# Altium PCB PCB_СDC_emu_ALPINE.PcbDoc
Units mm, origin at the board's own origin, x right, y up, seen from the top; angles counter-clockwise.
Board outline 73 x 43 mm, 2 copper layers (Top Layer, Bottom Layer); 51 components, 60 nets, 225 pads, 15 vias.
Unrouted connection lines stored in the file: 1.
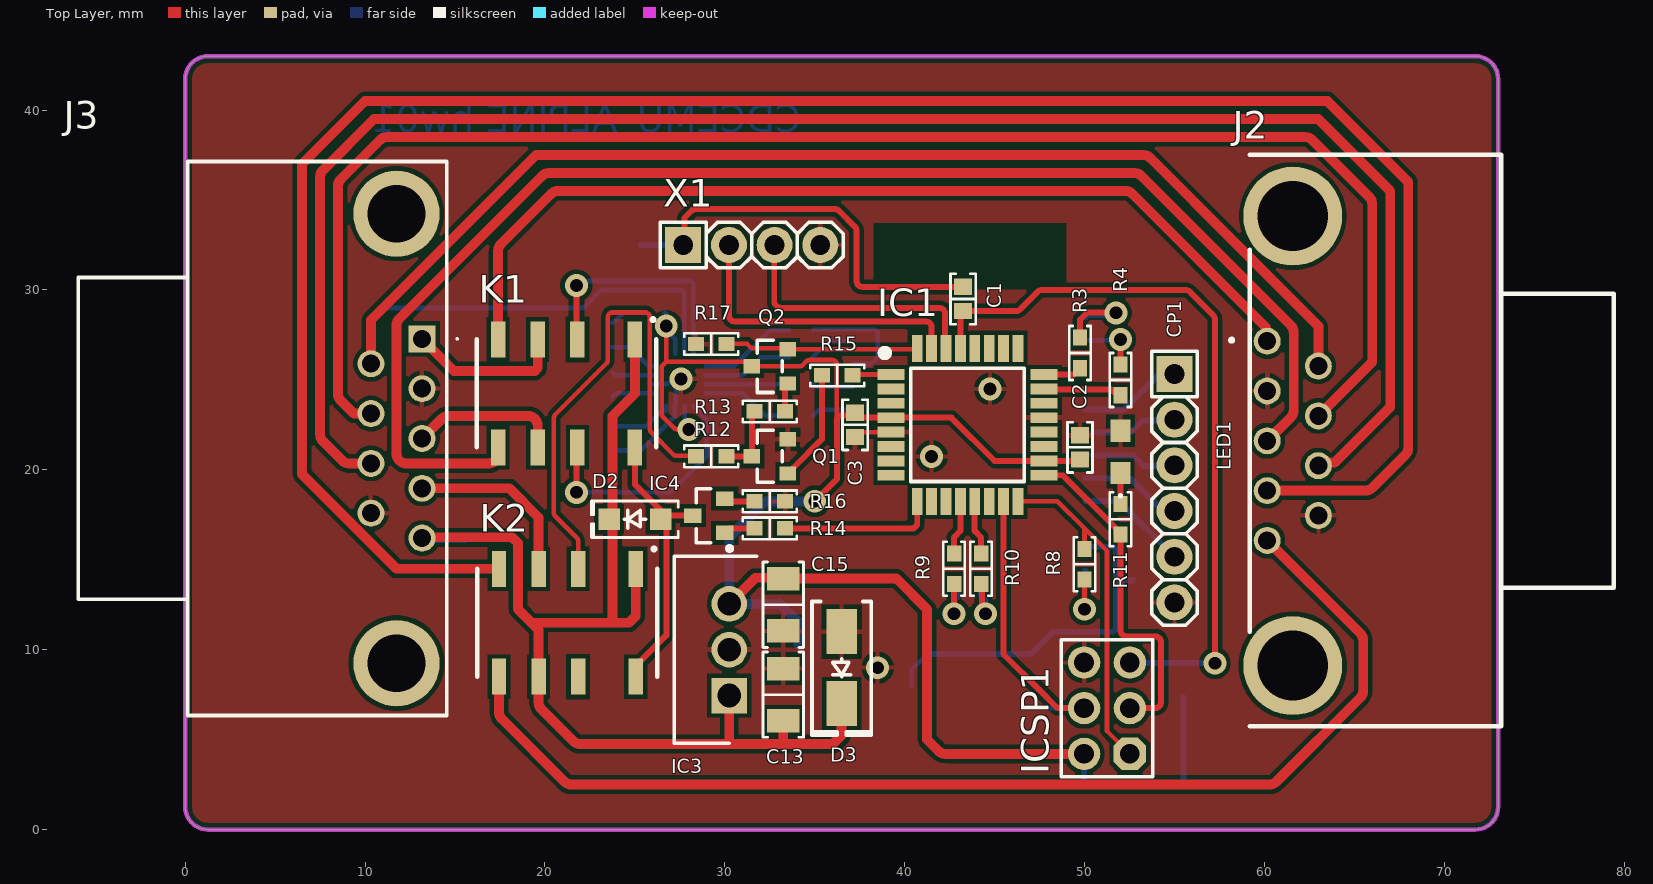
[diagram p0: Top Layer view]
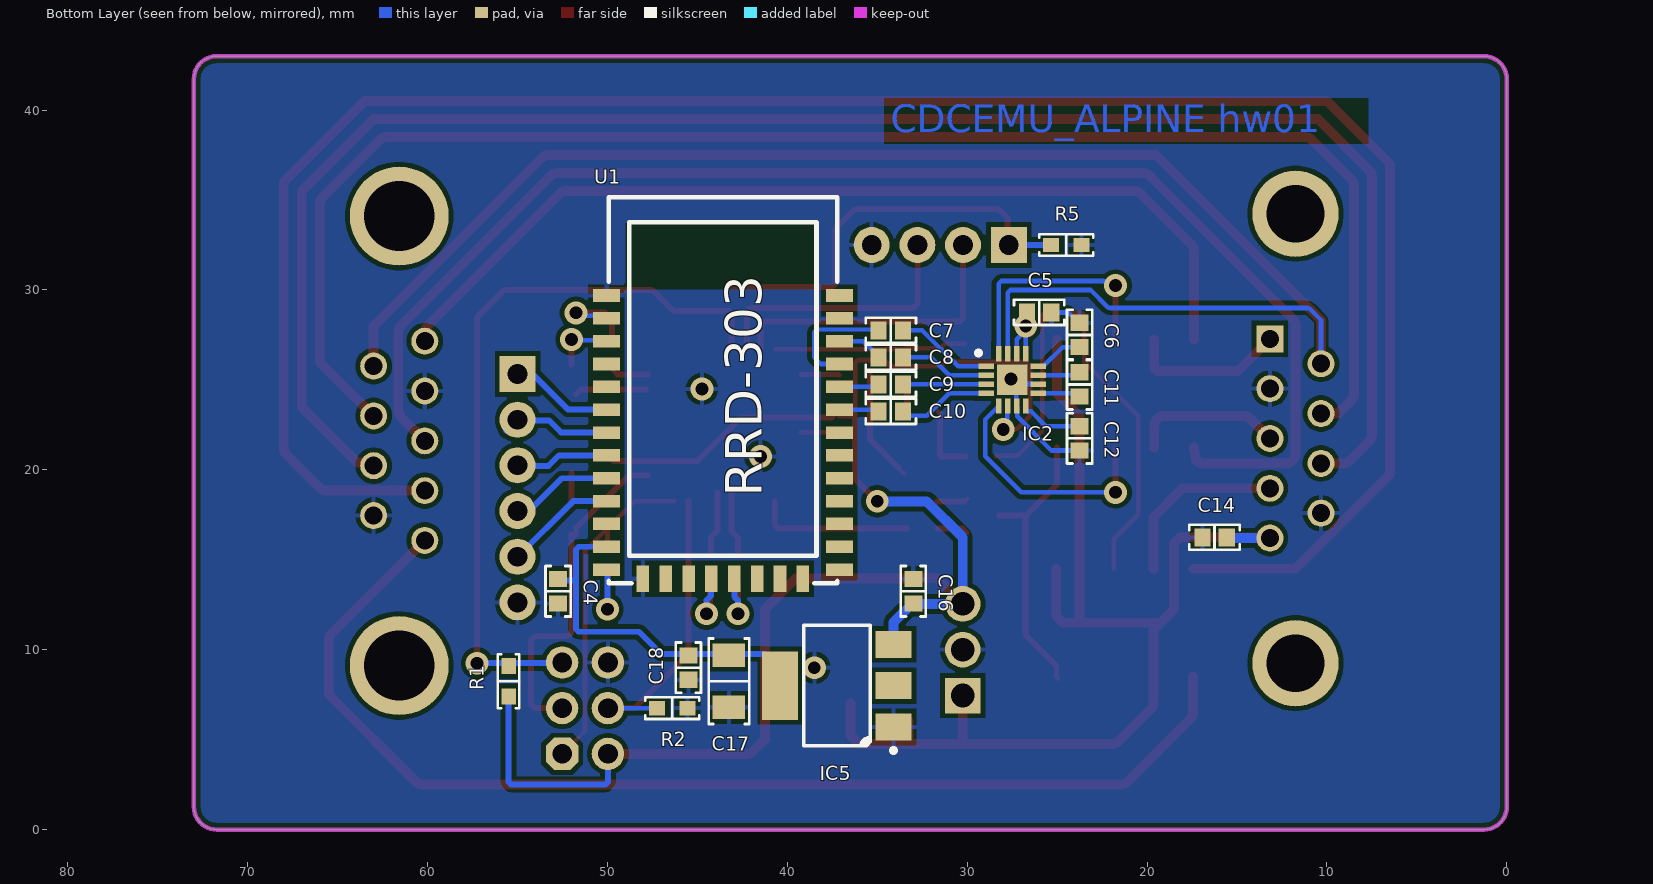
[diagram p1: Bottom Layer view, seen from below]
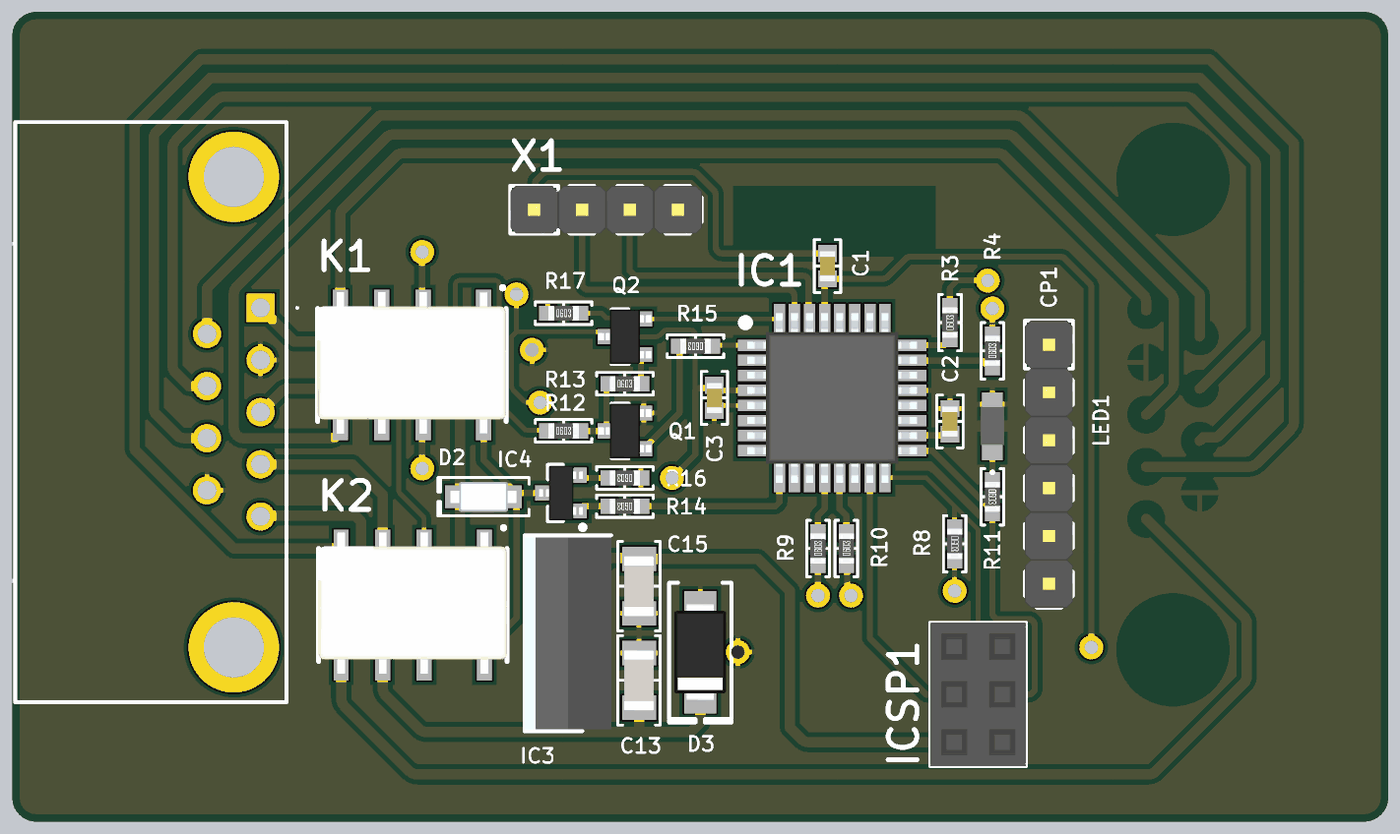
[diagram p2: 3D render of the assembled board from above, using the file's embedded part models]
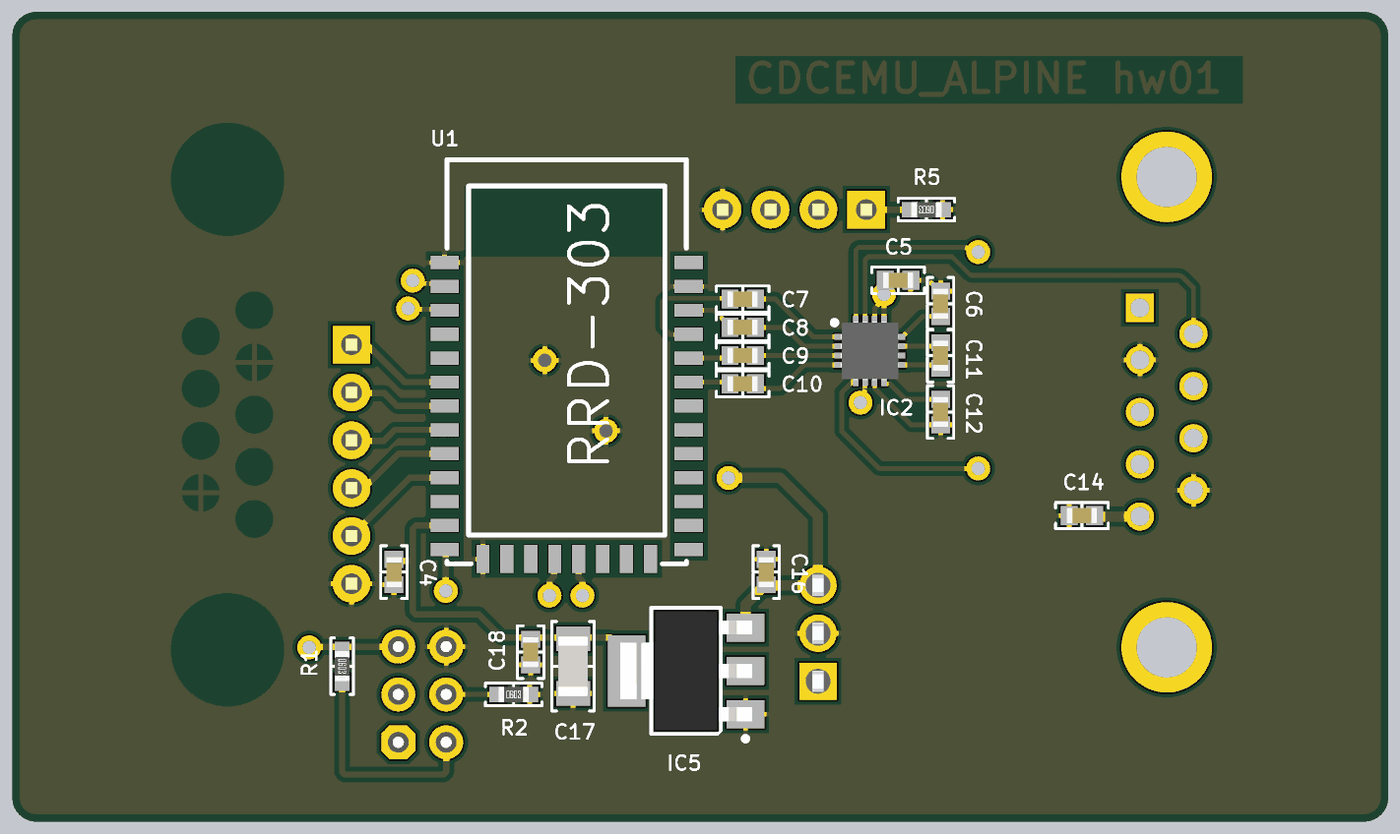
[diagram p3: 3D render of the assembled board from below, using the file's embedded part models]

## Layer stack, top to bottom
Top Solder: solder mask 0.0102, Solder Resist, Dk 3.5
Top Layer: signal copper 0.0356
Dielectric 1: dielectric 0.32, FR-4, Dk 4.8
Bottom Layer: signal copper 0.0356
Bottom Solder: solder mask 0.0102, Solder Resist, Dk 3.5

## Board outline
1.27,0 cw(c1.27,1.27) 0,1.27 0,41.73 cw(c1.27,41.73) 1.27,43 71.73,43 cw(c71.73,41.73) 73,41.73 73,1.27 cw(c71.73,1.27) 71.73,0

## Design rules (kind name [scope] priority, off if disabled: settings)
Clearance [All] p1: gap=0.254 ignorepadtopadclearanceinfootprint=FALSE except(0.127: Arc-Text Arc-Hole Track-Text Track-Hole SMDPad-Text SMDPad-Hole THPad-Text THPad-Hole Via-Text Via-Hole Fill-Text Fill-Hole Poly-Text Poly-Hole Region-Text Region-Hole Text-Text Text-Hole; 0.15: Arc-Arc Arc-Track Arc-SMDPad Arc-THPad Arc-Via Track-Track Track-SMDPad Track-THPad Track-Via SMDPad-SMDPad SMDPad-THPad SMDPad-Via THPad-THPad THPad-Via Via-Via)
PolygonConnect [All] p1: connectstyle=Relief reliefconductorwidth=0.254 reliefentries=4 polygonreliefangle="90 Angle" airgapwidth=0.254
RoutingVias [All] p1: holewidth=0.711 width=1.27 viastyle="Through Hole" minholewidth=0.711 minwidth=1.27 maxholewidth=0.711 maxwidth=1.27
SolderMaskExpansion [All] p1: expansion=0.102 istentingtop=FALSE
Width [All] p1: maxlimit=0.55 minlimit=0.22 preferedwidth=0.33 minimp=50.000000 maximp=50.000000 favimp=50.000000
30 further rules are at their usual default settings.

## Classes and differential pairs
component class DIFFAMP: C5 C6 C7 C8 C9 C10 C11 C12 C13 C14 C15 C16 C17 C18 D2 D3 IC2 IC3 IC4 IC5 J2 J3 K1 K2 Q1 Q2 R12 R13 R14 R15 R16 R17
component class MC: C1 C2 C3 C4 CP1 IC1 ICSP1 LED1 R1 R2 R3 R4 R5 R8 R9 R10 R11 U1 X1

## Components (designator, comment, footprint, x,y, rotation, side; value= is the part's Value field where it differs from the comment)
C1 "0.1 µF" "CAP 0603_1608" 43.25,29.5 r270 top
C2 "0.1 µF" "CAP 0603_1608" 49.75,21.25 r270 top
C3 "0.1 µF" "CAP 0603_1608" 37.25,22.5 r90 top
C4 "0.1 µF" "CAP 0603_1608" 52.75,13.25 r90 bottom
C5 "1 µF" "CAP 0603_1608" 26,28.75 r0 bottom
C6 "1 µF" "CAP 0603_1608" 23.75,27.5 r90 bottom
C7 "1 µF" "CAP 0603_1608" 34.25,27.75 r180 bottom
C8 "1 µF" "CAP 0603_1608" 34.25,26.25 r180 bottom
C9 "1 µF" "CAP 0603_1608" 34.25,24.75 r180 bottom
C10 "1 µF" "CAP 0603_1608" 34.25,23.25 r180 bottom
C11 "1 µF" "CAP 0603_1608" 23.75,24.75 r90 bottom
C12 "1 µF" "CAP 0603_1608" 23.75,21.75 r90 bottom
C13 "22 µF" "CAP 1206_3216 - 0.8MM" 33.25,7.5 r270 top
C14 "0.1 µF" "CAP 0603_1608" 16.25,16.25 r180 bottom
C15 "22 µF" "CAP 1206_3216 - 0.8MM" 33.25,12.5 r90 top
C16 "0.1 µF" "CAP 0603_1608" 33,13.25 r270 bottom
C17 "22 µF" "CAP 1206_3216 - 0.8MM" 43.25,8.25 r90 bottom
C18 "0.1 µF" "CAP 0603_1608" 45.5,9 r90 bottom
CP1 "Connector, 6pin, 2.54mm, 500VAC, 3A" "CON: PLS-6" 55,18.98 r270 top
D2 "SM4001PL-TP" SOD123F 25,17.25 r180 top
D3 "SMAJ12A-TR" "DO214AC SMA" 36.5,9 r270 top
IC1 "ATMEGA328PB-AU" QFP80P900X900X120-32N 43.5,22.5 r0 top
IC2 "PAM8908JER" QFN50P300X300X65-17N 27.5,25 r180 bottom
IC3 "L7805CV" TO255P460X1020X2008-3P 30.25,7.45 r90 top
IC4 "IRLML6244TRPBF" "INFINEON SOT-23-3" 29.115,17.45 r180 top
IC5 "LDL1117S33R" "ST SOT-223" 37.25,8 r0 bottom
ICSP1 "Connector, 6pin, 2.54mm, 500VAC, 3A" "CON: PBD-6" 51.25,6.75 r90 top
J2 "DS1037-01-09FNAKSI74" DS1037-01-09FNAKSI74 79.43,21.615 r90 top
J3 "DS1037-01-09MNAKT74" DS10370109MNAKT74 13.17,27.285 r270 top
K1 "IM03GR" IM06GR 21.2,24.25 r180 top
K2 "IM03GR" IM06GR 21.25,11.5 r180 top
LED1 "KP2012SGC" KP2012SGC 52,21 r90 top
Q1 "BC817-25-7-F" "DIODES SOT-23-3" 32.5,20.75 r180 top
Q2 "BC817-25-7-F" "DIODES SOT-23-3" 32.5,25.75 r180 top
R1 "10 kOhms" "YAGEO RES 0603_1608" 55.5,8.25 r270 bottom
R2 "10 kOhms" "YAGEO RES 0603_1608" 46.4,6.75 r180 bottom
R3 "10 kOhms" "YAGEO RES 0603_1608" 49.75,26.5 r90 top
R4 "10 kOhms" "YAGEO RES 0603_1608" 52,25 r90 top
R5 "10 kOhms" "YAGEO RES 0603_1608" 24.5,32.5 r0 bottom
R8 "10 kOhms" "YAGEO RES 0603_1608" 50,14.75 r270 top
R9 "10 kOhms" "YAGEO RES 0603_1608" 42.75,14.5 r90 top
R10 "10 kOhms" "YAGEO RES 0603_1608" 44.25,14.5 r90 top
R11 "1 kOhms" "YAGEO RES 0603_1608" 52,17.25 r270 top
R12 "22 Ohms" "YAGEO RES 0603_1608" 29.25,20.75 r0 top
R13 "150 kOhms" "YAGEO RES 0603_1608" 32.5,23.25 r0 top
R14 "10 kOhms" "YAGEO RES 0603_1608" 32.5,16.75 r180 top
R15 "4.7 kOhms" "YAGEO RES 0603_1608" 36.25,25.25 r180 top
R16 "10 Ohms" "YAGEO RES 0603_1608" 32.5,18.25 r180 top
R17 "10 kOhms" "YAGEO RES 0603_1608" 29.25,27 r0 top
U1 "RRD-303" RRD-303 43.586,24.239 r180 bottom
X1 "Connector, 4pin, 2.54mm, 500VAC, 3A" "CON: PLS-4" 31.501,32.499 r0 top

## Footprints (in the part's own frame and the unit in brackets; to place one, negate y for a bottom-side part, rotate by r counter-clockwise, add the part's x,y. Pads: shape width x height; smd on the part's side, far side on the other; paste and mask are expansions set on the pad)
"CAP 0603_1608" [mm] "Chip Capacitor, 2-Leads, Body 1.60x0.80mm, IPC Medium Density"
  rect 0.9x1 smd: 1(-0.675,0) 2(0.675,0)
  silkscreen extent -1.4,-0.7 1.4,0.7, body extent -0.8,-0.41 0.8,0.41, height 0.82
"CAP 1206_3216 - 0.8MM" [mm] "Chip Capacitor, 2-Leads, Body 3.25x1.60mm, IPC Medium Density"
  rect 1.3x1.8 smd: 1(-1.45,0) 2(1.45,0)
  silkscreen extent -2.38,-1.13 2.37,1.12, body extent -1.6,-0.8 1.6,0.8, height 0.8
"CON: PBD-6" [mm] "PBD-6"
  oct 1.8x1.8 hole 1.1: 1(-2.54,-1.27)
  round 1.8 hole 1.1: 2(-2.54,1.27) 3(0,-1.27) 4(0,1.27) 5(2.54,-1.27) 6(2.54,1.27)
  silkscreen extent -3.81,-2.54 3.81,2.54, body extent -3.81,-2.54 3.81,2.54, height 8.5
"CON: PLS-4" [mm] "PLS-40 4 pin header"
  rect 2x2 hole 1.1: 1(-3.81,0)
  round 2 hole 1.1: 2(-1.27,0) 3(1.27,0) 4(3.81,0)
  silkscreen extent -5.08,-1.27 5.08,1.27, body extent -5.08,-1.27 5.08,1.27, height 8.54
"CON: PLS-6" [mm]
  rect 2x2 hole 1.1: 1(-6.35,0)
  round 2 hole 1.1: 2(-3.81,0) 3(-1.27,0) 4(1.27,0) 5(3.81,0) 6(6.35,0)
  silkscreen extent -7.62,-1.27 7.62,1.27, body extent -7.62,-1.27 7.62,1.27, height 8.54
"DIODES SOT-23-3" [mm] "SOT23, 3-Leads, Body 2.90x2.40mm, Pitch 0.95mm, IPC Medium Density"
  rect 0.9x0.8 smd: 1(-1,0.95) 2(-1,-0.95) 3(1,0)
  silkscreen extent -0.7,-1.45 0.7,1.45, body extent -1.41,-1.45 1.41,1.45, height 1.5
"DO214AC SMA" [mm] "Molded Diode, 2-Leads, Body 4.30x2.60mm, IPC Medium Density"
  rect 2.5x1.7 smd: 1(-2,0) 2(2,0)
  silkscreen extent -3.68,-1.65 3.75,1.65, body extent -2.6,-1.37 2.6,1.37, height 2.4
DS1037-01-09FNAKSI74 [mm]
  round 1.5 hole 1: 1(5.54,19.27) 2(2.77,19.27) 3(0,19.27) 4(-2.77,19.27) 5(-5.54,19.27) 6(4.155,16.43) 7(1.385,16.43) 8(-1.385,16.43) 9(-4.155,16.43)
  round 5.5 hole 3.9: 10(-12.495,17.85) 11(12.495,17.85)
  silkscreen extent -15.86,0 15.91,21.32
DS10370109MNAKT74 [mm]
  rect 1.5x1.5 hole 1: 1(0,0)
  round 1.5 hole 1: 2(2.77,0) 3(5.54,0) 4(8.31,0) 5(11.08,0) 6(1.385,-2.84) 7(4.155,-2.84) 8(6.925,-2.84) 9(9.695,-2.84)
  round 4.8 hole 3.2: MH1(-6.955,-1.42) MH2(18.035,-1.42)
  silkscreen extent -9.86,-19.12 20.94,2
IM06GR [mm]
  rect 0.8x2 smd: 1(-3.8,-3) 2(-0.6,-3) 3(1.6,-3) 4(3.8,-3) 5(3.8,3) 6(1.6,3) 7(-0.6,3) 8(-3.8,3)
  silkscreen extent -5,-4.17 5,3, body extent -5,-3.86 5,3.64, height 5.65
"INFINEON SOT-23-3" [mm] "SOT23, 3-Leads, Body 2.90x2.40mm, Pitch 0.95mm, IPC Medium Density"
  rect 0.972x0.802 smd: 1(-0.885,0.95) 2(-0.885,-0.95) 3(0.885,0)
  silkscreen extent -1.28,-1.5 0.7,1.95, body extent -1.16,-1.45 1.16,1.45, height 1
KP2012SGC [mm]
  rect 1.25x1.1 smd: 1(-1.175,0) 2(1.175,0)
  silkscreen extent -2.5,-0.05 -2.4,0.05, body extent -1,-0.63 1,0.63, height 1.2
QFN50P300X300X65-17N [mm]
  rect 0.85x0.3 smd: 1(-1.45,0.75) 2(-1.45,0.25) 3(-1.45,-0.25) 4(-1.45,-0.75) 9(1.45,-0.75) 10(1.45,-0.25) 11(1.45,0.25) 12(1.45,0.75)
  rect 0.3x0.85 smd: 5(-0.75,-1.45) 6(-0.25,-1.45) 7(0.25,-1.45) 8(0.75,-1.45) 13(0.75,1.45) 14(0.25,1.45) 15(-0.25,1.45) 16(-0.75,1.45)
  rect 1.7x1.7 smd: 17(0,0)
  silkscreen extent -2,1.38 -1.75,1.62, body extent -1.55,-1.55 1.55,1.55, height 0.65
QFP80P900X900X120-32N [mm]
  rect 1.5x0.6 smd: 1(-4.25,2.8) 2(-4.25,2) 3(-4.25,1.2) 4(-4.25,0.4) 5(-4.25,-0.4) 6(-4.25,-1.2) 7(-4.25,-2) 8(-4.25,-2.8) 17(4.25,-2.8) 18(4.25,-2) 19(4.25,-1.2) 20(4.25,-0.4) 21(4.25,0.4) 22(4.25,1.2) 23(4.25,2) 24(4.25,2.8)
  rect 0.6x1.5 smd: 9(-2.8,-4.25) 10(-2,-4.25) 11(-1.2,-4.25) 12(-0.4,-4.25) 13(0.4,-4.25) 14(1.2,-4.25) 15(2,-4.25) 16(2.8,-4.25) 25(2.8,4.25) 26(2,4.25) 27(1.2,4.25) 28(0.4,4.25) 29(-0.4,4.25) 30(-1.2,4.25) 31(-2,4.25) 32(-2.8,4.25)
  silkscreen extent -4.8,-3.15 3.15,4.2, body extent -4.5,-4.5 4.5,4.5, height 1.2
RRD-303 [mm]
  rect 1.5x0.7 smd paste+0 mask+0.051: 1(-6.477,5.455) 2(-6.477,4.185) 3(-6.477,2.915) 4(-6.477,1.645) 5(-6.477,0.375) 6(-6.477,-0.895) 7(-6.477,-2.165) 8(-6.477,-3.435) 9(-6.477,-4.705) 10(-6.477,-5.975) 11(-6.477,-7.245) 12(-6.477,-8.515) 13(-6.477,-9.785) 14(6.477,5.455) 15(6.477,4.185) 16(6.477,2.915) 17(6.477,1.645) 18(6.477,0.375) 19(6.477,-0.895) 20(6.477,-2.165) 21(6.477,-3.435) 22(6.477,-4.705) 23(6.477,-5.975) 24(6.477,-7.245) 25(6.477,-8.515) 26(6.477,-9.785)
  rect 0.7x1.5 smd paste+0 mask+0.051: 27(-4.445,-10.293) 28(-3.175,-10.293) 29(-1.905,-10.293) 30(-0.635,-10.293) 31(0.635,-10.293) 32(1.905,-10.293) 33(3.175,-10.293) 34(4.445,-10.293)
  silkscreen extent -6.35,-10.55 6.35,10.92
SOD123F [mm] "SODFL, 2-Leads, Body 1.60x3.50mm, IPC Medium Density"
  rect 1.2x1.2 smd: 1(-1.43,0) 2(1.43,0)
  silkscreen extent -2.41,-1.02 2.41,1.02, body extent -1.75,-0.8 1.75,0.8, height 1.1
"ST SOT-223" [mm] "SOT223, 4-Leads, Body 6.50x7.00mm (avg), Pitch 2.30mm, IPC Medium Density"
  rect 2x1.5 smd: 1(-3.15,2.3) 2(-3.15,0) 3(-3.15,-2.3)
  rect 2x3.8 smd: 4(3.15,0)
  silkscreen extent -3.27,-3.35 1.85,3.72, body extent -3.52,-3.25 3.5,3.25, height 1.8
TO255P460X1020X2008-3P [mm]
  rect 1.98x1.98 hole 1.32: 1(0,0)
  round 1.98 hole 1.32: 2(2.55,0) 3(5.1,0)
  silkscreen extent -2.65,-1.53 7.75,3.07, body extent -2.55,-1.53 7.65,3.07, height 19.21
"YAGEO RES 0603_1608" [mm] "Chip Resistor, 2-Leads, Body 1.60x0.80mm"
  rect 0.9x0.8 smd: 1(-0.85,0) 2(0.85,0)
  silkscreen extent -1.5,-0.6 1.5,0.6, body extent -0.8,-0.4 0.8,0.4, height 0.45

## Part data
C1 C2 C3 C4 C14 C16 C18: library part CC0603KRX7R7BB104, "CAP CER 0.1UF 16V X7R 0603", Device Package="0603 (1608 Metric)", Manufacturer=Yageo, Operating Temperature="-55°C ~ 125°C", Supplier Part Number 1=311-1088-1-ND, Temperature Coefficient=X7R, Tolerance=±10%, Voltage - Rated=16V, Applications="General Purpose", Capacitance="0.1 µF", componentlink1description=Datasheet, componentlink1url=https://www.yageo.com/upload/media/product/productsearch/datasheet/mlcc/UPY-GPHC_X7R_6.3V-to-50V_18.pdf, componentlink2description="DigiKey Link", componentlink2url=https://www.digikey.com/en/products/detail/yageo/CC0603KRX7R7BB104/302822, lastupdated="09.02.2024 20:10:09", Lifecycle Status=Active, Minimum Order=1, Mounting Type="Surface Mount, MLCC", Package / Case="0603 (1608 Metric)", packaging=TapeAndReel, Part Number=CC0603KRX7R7BB104, Part Status=Active, partid=16746, price=0.01, series=CC, Size / Dimension="0.063\" L x 0.031\" W (1.60mm x 0.80mm)", Supplier 1=DigiKey, Thickness (Max)="0.035\" (0.90mm)"
C5 C6 C7 C8 C9 C10 C11 C12: library part CC0603KRX5R8BB105, "CAP CER 1UF 25V X5R 0603", Device Package="0603 (1608 Metric)", Manufacturer=Yageo, Operating Temperature="-55°C ~ 85°C", Supplier Part Number 1=311-1445-1-ND, Temperature Coefficient=X5R, Tolerance=±10%, Voltage - Rated=25V, Applications="General Purpose", Capacitance="1 µF", componentlink1description=Datasheet, componentlink1url=https://www.yageo.com/upload/media/product/productsearch/datasheet/mlcc/UPY-GPHC_X5R_4V-to-50V_25.pdf, componentlink2description="DigiKey Link", componentlink2url=https://www.digikey.com/en/products/detail/yageo/CC0603KRX5R8BB105/2833610, lastupdated="09.02.2024 20:10:27", Lifecycle Status=Active, Minimum Order=1, Mounting Type="Surface Mount, MLCC", Package / Case="0603 (1608 Metric)", packaging=TapeAndReel, Part Number=CC0603KRX5R8BB105, Part Status=Active, partid=5146, price=0.01, series=CC, Size / Dimension="0.063\" L x 0.031\" W (1.60mm x 0.80mm)", Supplier 1=DigiKey, Thickness (Max)="0.035\" (0.90mm)"
C13 C15 C17: library part CC1206MKX5R8BB226, "CAP CER 22UF 25V X5R 1206", Device Package="1206 (3216 Metric)", Manufacturer=Yageo, Operating Temperature="-55°C ~ 85°C", Supplier Part Number 1=311-3522-1-ND, Temperature Coefficient=X5R, Tolerance=±20%, Voltage - Rated=25V, Applications="General Purpose", Capacitance="22 µF", componentlink1description=Datasheet, componentlink1url=https://www.yageo.com/upload/media/product/productsearch/datasheet/mlcc/UPY-GPHC_X5R_4V-to-50V_26.pdf, componentlink2description="DigiKey Link", componentlink2url=https://www.digikey.com/en/products/detail/yageo/CC1206MKX5R8BB226/7164406, lastupdated="04.06.2024 19:10:10", Lifecycle Status=Active, Minimum Order=1, Mounting Type="Surface Mount, MLCC", Package / Case="1206 (3216 Metric)", packaging=TapeAndReel, Part Number=CC1206MKX5R8BB226, Part Status=Active, partid=45374, price=0.13, series=CC, Size / Dimension="0.126\" L x 0.063\" W (3.20mm x 1.60mm)", Supplier 1=DigiKey, Thickness (Max)="0.075\" (1.90mm)"
CP1: library part PLS-6, CurrentMax=3A, Manufacturer=Connfly, VoltageMax=500VAC, CommentText="\"QCCSPI\"", HelpURL=https://www.chipdip.ru/product/pls-6, Multichannel=6pin, PartNumber=PLS-6, Pitch=2.54mm, TypeConnector=Connector, ValueManufacturerPartNumber="Connector, 6pin, 2.54mm, 500VAC, 3A"
D2: "DIODE GEN PURP 50V 1A SOD123FL", Capacitance @ Vr, F="15pF @ 4V, 1MHz", Current - Average Rectified (Io)=1A, Current - Reverse Leakage @ Vr="5 µA @ 50 V", Manufacturer="Micro Commercial Co", Operating Temperature - Junction="-65°C ~ 175°C", Package / Case=SOD-123F, Supplier Device Package=SOD-123FL, Supplier Part Number 1=SM4001PL-TPMSCT-ND, Voltage - DC Reverse (Vr) (Max)="50 V", Voltage - Forward (Vf) (Max) @ If="1.1 V @ 1 A", componentlink1description=Datasheet, componentlink1url=https://www.mccsemi.com/pdf/Products/SM4001PL-SM4007PL(SOD-123FL).PDF, componentlink2description="DigiKey Link", componentlink2url=https://www.digikey.com/en/products/detail/micro-commercial-co/SM4001PL-TP/1793244, Diode Type=Standard, lastupdated="15.07.2023 19:37:24", Lifecycle Status=Active, Minimum Order=1, Mounting Type="Surface Mount", packaging=TapeAndReel, Part Number=SM4001PL-TP, Part Status=Active, partid=1093, price=0.03, series=-, Speed="Standard Recovery >500ns, > 200mA (Io)", Supplier 1=DigiKey
D3: "TVS DIODE 12VWM 25.3VC SMA", Current - Peak Pulse (10/1000µs)="91A (8/20µs)", Manufacturer=STMicroelectronics, Operating Temperature="-55°C ~ 150°C (TJ)", Package / Case="DO-214AC, SMA", Power - Peak Pulse=400W, Power Line Protection=No, Supplier Device Package="DO-214AC (SMA)", Supplier Part Number 1=497-6503-1-ND, Voltage - Breakdown (Min)=13.3V, Voltage - Clamping (Max) @ Ipp=25.3V, Voltage - Reverse Standoff (Typ)=12V, Applications="General Purpose", componentlink1description=Datasheet, componentlink1url=http://www.st.com/content/ccc/resource/technical/document/datasheet/ff/c0/80/cc/19/4c/45/af/CD00001333.pdf/files/CD00001333.pdf/_jcr_content/translations/en.CD00001333.pdf, componentlink2description="DigiKey Link", componentlink2url=https://www.digikey.com/en/products/detail/stmicroelectronics/SMAJ12A-TR/1039101, lastupdated="03.06.2024 19:57:26", Lifecycle Status=Active, Minimum Order=1, Mounting Type="Surface Mount", packaging=TapeAndReel, Part Number=SMAJ12A-TR, Part Status=Active, partid=6160, price=0.09, series="SMAJ, TRANSIL™", Supplier 1=DigiKey, Type=Zener, Unidirectional Channels=1
IC1: "Integrated Circuit", Manufacturer_Name=Microchip, Mouser Part Number=556-ATMEGA328PB-AU, Arrow Part Number=ATMEGA328PB-AU, Arrow Price/Stock=https://www.arrow.com/en/products/atmega328pb-au/microchip-technology?region=nac, Datasheet Link=http://www.farnell.com/datasheets/2014286.pdf, Height=1.2mm, Manufacturer_Part_Number=ATMEGA328PB-AU, Mouser Price/Stock=https://www.mouser.co.uk/ProductDetail/Microchip-Technology/ATMEGA328PB-AU?qs=jy4bLUHv09hbFONgGrqPbw%3D%3D
IC2: "Integrated Circuit", Manufacturer_Name="Diodes Incorporated", Mouser Part Number=621-PAM8908JER, Arrow Part Number=PAM8908JER, Arrow Price/Stock=https://www.arrow.com/en/products/pam8908jer/diodes-incorporated?region=asia, Datasheet Link=https://www.diodes.com//assets/Datasheets/PAM8908.pdf, Height=0.65mm, Manufacturer_Part_Number=PAM8908JER, Mouser Price/Stock=https://www.mouser.co.uk/ProductDetail/Diodes-Incorporated/PAM8908JER?qs=%252BSlWJf1dfkITtmNpMlm%252Bnw%3D%3D
IC3: "Integrated Circuit", Manufacturer_Name=STMicroelectronics, Mouser Part Number=511-L7805CV, Arrow Part Number=L7805CV, Arrow Price/Stock=https://www.arrow.com/en/products/l7805cv/stmicroelectronics?region=europe, Datasheet Link=http://www.st.com/web/en/resource/technical/document/datasheet/CD00000444.pdf, Height=4.6mm, Manufacturer_Part_Number=L7805CV, Mouser Price/Stock=https://www.mouser.co.uk/ProductDetail/STMicroelectronics/L7805CV?qs=9NrABl3fj%2FqplZAHiYUxWg%3D%3D
IC4: "MOSFET N-CH 20V 6.3A SOT23", Current - Continuous Drain (Id) @ 25°C="6.3A (Ta)", Drain to Source Voltage (Vdss)="20 V", Drive Voltage (Max Rds On,  Min Rds On)="2.5V, 4.5V", Input Capacitance (Ciss) (Max) @ Vds="700 pF @ 16 V", Manufacturer="Infineon Technologies", Operating Temperature="-55°C ~ 150°C (TJ)", Package / Case="TO-236-3, SC-59, SOT-23-3", Power Dissipation (Max)="1.3W (Ta)", Supplier Device Package=Micro3™/SOT-23, Supplier Part Number 1=IRLML6244TRPBFCT-ND, componentlink1description=Datasheet, componentlink1url=https://www.infineon.com/dgdl/irlml6244pbf.pdf?fileId=5546d462533600a4015356686fed261f, componentlink2description="DigiKey Link", componentlink2url=https://www.digikey.com/en/products/detail/infineon-technologies/IRLML6244TRPBF/2393871, FET Type=N-Channel, Gate Charge (Qg) (Max) @ Vgs="8.9 nC @ 4.5 V", lastupdated="03.06.2024 20:15:22", Lifecycle Status=Active, Minimum Order=1, Mounting Type="Surface Mount", packaging=TapeAndReel, Part Number=IRLML6244TRPBF, Part Status=Active, price=0.09, Rds On (Max) @ Id, Vgs="21mOhm @ 6.3A, 4.5V", series=HEXFET®, Supplier 1=DigiKey, Technology="MOSFET (Metal Oxide)", Vgs (Max)=±12V, Vgs(th) (Max) @ Id="1.1V @ 10µA"
IC5: "IC REG LINEAR 3.3V 1.2A SOT223", Current - Output=1.2A, Current - Quiescent (Iq)="500 µA", Manufacturer=STMicroelectronics, Operating Temperature="-40°C ~ 125°C (TJ)", Package / Case="TO-261-4, TO-261AA", Supplier Device Package=SOT-223, Supplier Part Number 1=497-17239-1-ND, Voltage - Input (Max)=18V, Voltage - Output (Min/Fixed)=3.3V, Voltage Dropout (Max)="0.6V @ 1.2A", componentlink1description=Datasheet, componentlink1url=http://www.st.com/content/ccc/resource/technical/document/datasheet/group3/0e/5a/00/ca/10/1a/4f/a5/DM00366442/files/DM00366442.pdf/jcr:content/translations/en.DM00366442.pdf, componentlink2description="DigiKey Link", componentlink2url=https://www.digikey.com/en/products/detail/stmicroelectronics/LDL1117S33R/7102071, lastupdated="03.06.2024 20:25:59", Lifecycle Status=Active, Minimum Order=1, Mounting Type="Surface Mount", Number of Regulators=1, Output Configuration=Positive, Output Type=Fixed, packaging=TapeAndReel, Part Number=LDL1117S33R, Part Status=Active, price=0.31, Protection Features="Over Current, Over Temperature, Under Voltage Lockout (UVLO)", PSRR="87dB ~ 65dB (120Hz ~ 100kHz)", series=-, Supplier 1=DigiKey
ICSP1: library part PBD-6, CurrentMax=3A, Manufacturer=Connfly, VoltageMax=500VAC, CommentText=ICSP, HelpURL=https://www.chipdip.ru/product/pbd-6, Multichannel=6pin, PartNumber=PBD-6, Pitch=2.54mm, TypeConnector=Connector, ValueManufacturerPartNumber="Connector, 6pin, 2.54mm, 500VAC, 3A"
J2 J3: "Connector", Manufacturer_Name=Connfly
  J2: Manufacturer_Part_Number=DS1037-01-09FNAKSI74
  J3: Datasheet Link=http://en.connfly.group/static/upload/file/pdf/DS1037-01.pdf, Height=12.88mm, Manufacturer_Part_Number=DS1037-01-09MNAKT74
K1 K2: "Relay or Contactor", Manufacturer_Name="TE Connectivity", Mouser Part Number=655-IM03GR, Arrow Part Number=IM03GR, Arrow Price/Stock=https://www.arrow.com/en/products/im03gr/te-connectivity?region=nac, Datasheet Link=https://datasheet.datasheetarchive.com/originals/distributors/Datasheets_SAMA/af0478e68580ade93768a4593bd7be66.pdf, Manufacturer_Part_Number=IM03GR, Mouser Price/Stock=https://www.mouser.co.uk/ProductDetail/TE-Connectivity/IM03GR?qs=h8jywBNgiq20bLq7q22y%252Bg%3D%3D
LED1: "LED", Manufacturer_Name=Kingbright, Mouser Part Number=N/A, Datasheet Link=https://docs.rs-online.com/9e3e/0900766b8032fa8b.pdf, Height=1.1mm, Manufacturer_Part_Number=KP2012SGC, Mouser Price/Stock=https://www.mouser.co.uk/ProductDetail/Kingbright/KP2012SGC?qs=5aG0NVq1C4xgkmzx8ebWbQ%3D%3D
Q1 Q2: "TRANS NPN 45V 0.5A SOT23-3", Current - Collector (Ic) (Max)="500 mA", Current - Collector Cutoff (Max)=100nA, DC Current Gain (hFE) (Min) @ Ic, Vce="160 @ 100mA, 1V", Frequency - Transition=100MHz, Manufacturer="Diodes Incorporated", Operating Temperature="-65°C ~ 150°C (TJ)", Package / Case="TO-236-3, SC-59, SOT-23-3", Power - Max="310 mW", Supplier Device Package=SOT-23-3, Supplier Part Number 1=BC817-25FDICT-ND, Voltage - Collector Emitter Breakdown (Max)="45 V", componentlink1description=Datasheet, componentlink1url=https://www.diodes.com/assets/Datasheets/ds11107.pdf, componentlink2description="DigiKey Link", componentlink2url=https://www.digikey.com/en/products/detail/diodes-incorporated/BC817-25-7-F/768871, lastupdated="03.06.2024 20:24:11", Lifecycle Status=Active, Minimum Order=1, Mounting Type="Surface Mount", packaging=TapeAndReel, Part Number=BC817-25-7-F, Part Status=Active, partid=114, price=0.02, series=-, Supplier 1=DigiKey, Transistor Type=NPN, Vce Saturation (Max) @ Ib, Ic="700mV @ 50mA, 500mA"
R1 R2 R3 R4 R5 R8 R9 R10 R14 R17: library part RC0603FR-1310KL, "RES 10K OHM 1% 1/10W 0603", Device Package="0603 (1608 Metric)", Manufacturer=Yageo, Operating Temperature="-55°C ~ 155°C", Power (Watts)="0.1W, 1/10W", Supplier Device Package=0603, Supplier Part Number 1=13-RC0603FR-1310KLCT-ND, Temperature Coefficient=±100ppm/°C, Tolerance=±1%, componentlink1description=Datasheet, componentlink1url=https://www.yageo.com/upload/media/product/productsearch/datasheet/rchip/PYu-RC_Group_51_RoHS_L_11.pdf, componentlink2description="DigiKey Link", componentlink2url=https://www.digikey.com/en/products/detail/yageo/RC0603FR-1310KL/12756399, Composition="Thick Film", Features="Moisture Resistant", Height - Seated (Max)="0.022\" (0.55mm)", lastupdated="25.07.2024 9:19:08", Lifecycle Status=Active, Minimum Order=1, Number of Terminations=2, Package / Case="0603 (1608 Metric)", packaging=CutTape, Part Number=RC0603FR-1310KL, Part Status=Active, partid=67561, price=0.01, Resistance="10 kOhms", series=RC_L, Size / Dimension="0.063\" L x 0.031\" W (1.60mm x 0.80mm)", Supplier 1=DigiKey
R11: library part RC0603FR-071KL, "RES 1K OHM 1% 1/10W 0603", Device Package="0603 (1608 Metric)", Manufacturer=Yageo, Operating Temperature="-55°C ~ 155°C", Power (Watts)="0.1W, 1/10W", Supplier Device Package=0603, Supplier Part Number 1=311-1.00KHRCT-ND, Temperature Coefficient=±100ppm/°C, Tolerance=±1%, componentlink1description=Datasheet, componentlink1url=https://www.yageo.com/upload/media/product/productsearch/datasheet/rchip/PYu-RC_Group_51_RoHS_L_10.pdf, componentlink2description="DigiKey Link", componentlink2url=https://www.digikey.com/en/products/detail/yageo/RC0603FR-071KL/726843, Composition="Thick Film", Features="Moisture Resistant", Height - Seated (Max)="0.022\" (0.55mm)", lastupdated="25.07.2024 9:19:19", Lifecycle Status=Active, Minimum Order=1, Number of Terminations=2, Package / Case="0603 (1608 Metric)", packaging=CutTape, Part Number=RC0603FR-071KL, Part Status=Active, partid=22600, price=0.01, Resistance="1 kOhms", series=RC_L, Size / Dimension="0.063\" L x 0.031\" W (1.60mm x 0.80mm)", Supplier 1=DigiKey
R12: library part RC0603JR-0722RL, "RES 22 OHM 5% 1/10W 0603", Device Package="0603 (1608 Metric)", Manufacturer=Yageo, Operating Temperature="-55°C ~ 155°C", Power (Watts)="0.1W, 1/10W", Supplier Device Package=0603, Supplier Part Number 1=311-22GRCT-ND, Temperature Coefficient=±100ppm/°C, Tolerance=±5%, componentlink1description=Datasheet, componentlink1url=https://www.yageo.com/upload/media/product/productsearch/datasheet/rchip/PYu-RC_Group_51_RoHS_L_10.pdf, componentlink2description="DigiKey Link", componentlink2url=https://www.digikey.com/en/products/detail/yageo/RC0603JR-0722RL/726743, Composition="Thick Film", Features="Moisture Resistant", Height - Seated (Max)="0.022\" (0.55mm)", lastupdated="25.07.2024 9:19:24", Lifecycle Status=Active, Minimum Order=1, Number of Terminations=2, Package / Case="0603 (1608 Metric)", packaging=CutTape, Part Number=RC0603JR-0722RL, Part Status=Active, partid=17085, price=0.01, Resistance="22 Ohms", series=RC_L, Size / Dimension="0.063\" L x 0.031\" W (1.60mm x 0.80mm)", Supplier 1=DigiKey
R13: library part RC0603FR-07150KL, "RES 150K OHM 1% 1/10W 0603", Device Package="0603 (1608 Metric)", Manufacturer=Yageo, Operating Temperature="-55°C ~ 155°C", Power (Watts)="0.1W, 1/10W", Supplier Device Package=0603, Supplier Part Number 1=311-150KHRCT-ND, Temperature Coefficient=±100ppm/°C, Tolerance=±1%, componentlink1description=Datasheet, componentlink1url=https://www.yageo.com/upload/media/product/productsearch/datasheet/rchip/PYu-RC_Group_51_RoHS_L_10.pdf, componentlink2description="DigiKey Link", componentlink2url=https://www.digikey.com/en/products/detail/yageo/RC0603FR-07150KL/726959, Composition="Thick Film", Features="Moisture Resistant", Height - Seated (Max)="0.022\" (0.55mm)", lastupdated="25.07.2024 9:19:21", Lifecycle Status=Active, Minimum Order=1, Number of Terminations=2, Package / Case="0603 (1608 Metric)", packaging=CutTape, Part Number=RC0603FR-07150KL, Part Status=Active, partid=18953, price=0.01, Resistance="150 kOhms", series=RC_L, Size / Dimension="0.063\" L x 0.031\" W (1.60mm x 0.80mm)", Supplier 1=DigiKey
R15: library part RC0603FR-074K7L, "RES 4.7K OHM 1% 1/10W 0603", Device Package="0603 (1608 Metric)", Manufacturer=Yageo, Operating Temperature="-55°C ~ 155°C", Power (Watts)="0.1W, 1/10W", Supplier Device Package=0603, Supplier Part Number 1=311-4.70KHRCT-ND, Temperature Coefficient=±100ppm/°C, Tolerance=±1%, componentlink1description=Datasheet, componentlink1url=https://www.yageo.com/upload/media/product/productsearch/datasheet/rchip/PYu-RC_Group_51_RoHS_L_10.pdf, componentlink2description="DigiKey Link", componentlink2url=https://www.digikey.com/en/products/detail/yageo/RC0603FR-074K7L/727212, Composition="Thick Film", Features="Moisture Resistant", Height - Seated (Max)="0.022\" (0.55mm)", lastupdated="25.07.2024 9:19:17", Lifecycle Status=Active, Minimum Order=1, Number of Terminations=2, Package / Case="0603 (1608 Metric)", packaging=CutTape, Part Number=RC0603FR-074K7L, Part Status=Active, partid=23949, price=0.01, Resistance="4.7 kOhms", series=RC_L, Size / Dimension="0.063\" L x 0.031\" W (1.60mm x 0.80mm)", Supplier 1=DigiKey
R16: library part RC0603FR-0710RL, "RES 10 OHM 1% 1/10W 0603", Device Package="0603 (1608 Metric)", Manufacturer=Yageo, Operating Temperature="-55°C ~ 155°C", Power (Watts)="0.1W, 1/10W", Supplier Device Package=0603, Supplier Part Number 1=311-10.0HRCT-ND, Temperature Coefficient=±200ppm/°C, Tolerance=±1%, componentlink1description=Datasheet, componentlink1url=https://www.yageo.com/upload/media/product/productsearch/datasheet/rchip/PYu-RC_Group_51_RoHS_L_10.pdf, componentlink2description="DigiKey Link", componentlink2url=https://www.digikey.com/en/products/detail/yageo/RC0603FR-0710RL/726879, Composition="Thick Film", Features="Moisture Resistant", Height - Seated (Max)="0.022\" (0.55mm)", lastupdated="25.07.2024 9:19:19", Lifecycle Status=Active, Minimum Order=1, Number of Terminations=2, Package / Case="0603 (1608 Metric)", packaging=TapeAndReel, Part Number=RC0603FR-0710RL, Part Status=Active, partid=22607, price=0.01, Resistance="10 Ohms", series=RC_L, Size / Dimension="0.063\" L x 0.031\" W (1.60mm x 0.80mm)", Supplier 1=DigiKey
X1: library part PLS-4, CurrentMax=3A, Manufacturer=Connfly, VoltageMax=500VAC, CommentText="\"Разъем\"", HelpURL=https://www.chipdip.ru/product/pls-4, Multichannel=4pin, PartNumber=PLS-4, Pitch=2.54mm, TypeConnector=Connector, ValueManufacturerPartNumber="Connector, 4pin, 2.54mm, 500VAC, 3A"

## Via types
v1: diameter 1.27, hole 0.711, Top Layer to Bottom Layer, 15 vias

## Nets (pads, with @x,y where several pads share a name; then routed paths per layer and width w, separated by ;. In a path a pad name is that pad's centre, name@x,y a point inside that pad or via, vN(x,y) a via of type N, cw(c..) or ccw(c..) an arc to the next point about the centre after c; other vN are vias at no path point)
+3.3: C4.2 C17.2 C18.2 IC5.2 IC5.4 U1.12 | length 20.4
  Bottom Layer w0.254: IC5.4 40.4,8.9 IC5.4@41.273,9.773 ; C18.2@45.45,9.675 C18.2 ; C4.2@52.676,13.851 C4.2
  Bottom Layer w0.33: IC5.4@41.273,9.773 47.023,9.773 48.25,11 51.601,11 51.75,11.149 51.75,13.851 ; U1.12 51.601,15.724 51.75,15.575 51.75,13.851 ; C4.2@52.676,13.851 51.75,13.851
+5: C2.2 C3.2 C5.2 C15.2 C16.2 IC1.4 IC1.18 IC2.6 IC2.13 IC2.14 IC3.3 IC5.3 ICSP1.2 Q2.3 R1.2 | length 100.2
  Top Layer w0.254: v1(26.75,28) 26.75,26.016 ; v1(28,22.25) 27.984,22.266 27.339,22.266 cw(c27.339,22.52) 27.16,22.34 26.574,22.926 cw(c26.754,23.105) 26.5,23.105 26.5,25.766 26.75,26.016 ; C15.2@33.2,14 C15.2 ; 36.233,22.879 36.233,23.018 36.233,25.854 ccw(c35.979,25.854) 35.979,26.108 34.713,26.108 ccw(c34.713,25.854) 34.534,26.034 34.324,25.824 cw(c34.145,26.004) 34.145,25.75 Q2.3 31.177,26.016 26.75,26.016 ; C3.2@37.093,23.018 C3.2 C3.2@37.525,22.9 ; C2.2@49.675,20.5 C2.2
  Top Layer w0.33: v1(35,18.25) 36.233,19.483 36.233,22.879 ; 36.372,23.018 C3.2@37.093,23.018 ; C3.2@37.525,22.9 IC1.4 42.6,22.9 45,20.5 C2.2@49.675,20.5
  Top Layer w0.55: IC3.3 31.7,14 C15.2@33.2,14 ; C15.2 39.55,13.95 41.25,12.25 41.25,5 41.879,4.371 41.88,4.37 ccw(c42.268,4.76) 42.268,4.21 ICSP1.2
  Bottom Layer w0.254: C5.2 26.75,28.675 v1(26.75,28) ; IC2.13 v1(26.75,28) ; IC2.14 27.25,27.256 26.75,27.756 v1(26.75,28) ; IC2.6 27.773,23.527 27.773,22.752 28,22.525 v1(28,22.25) ; C16.2@32.975,12.55 C16.2 C16.2@33.05,12.575
  Bottom Layer w0.33: ICSP1.2 49.98,2.649 50.129,2.5 55.351,2.5 55.5,2.649 R1.2@55.5,7.336
  Bottom Layer w0.55: C16.2@32.975,12.55 IC3.3 30.25,16.25 32.25,18.25 v1(35,18.25) ; C16.2@33.05,12.575 34.1,11.525 IC5.3
ACC: C13.2 C14.2 D2.2 D3.2 IC3.1 J3.5 K1.1 K2.1 K2.6 | length 65.9
  Top Layer w0.55: J3.5 13.215,16.25 18.178,16.25 18.5,15.928 18.5,12.25 19.25,11.5 ; K1.1 25,24.25 23.75,23 23.75,11.5 ; K2.1 25.05,11.872 24.678,11.5 23.75,11.5 ; IC3.1 30.25,4.75 ; C13.2 33.25,4.75 ; D3.2 36.5,5.25 36,4.75 33.25,4.75 ; 19.25,11.5 19.65,11.1 19.65,7.078 ccw(c20.2,7.078) 19.81,6.69 21.59,4.91 ccw(c21.978,5.3) 21.978,4.75 30.25,4.75 ; 19.25,11.5 23.75,11.5 ; 30.25,4.75 33.25,4.75
  Bottom Layer w0.254: C14.2@15.53,16.205 C14.2
  Bottom Layer w0.55: J3.5 C14.2@15.53,16.205
ACC_CD: J2.5 K2.5 | length 64.6
  Top Layer w0.55: K2.5 17.45,6.528 ccw(c18,6.528) 17.61,6.14 21.089,2.661 21.09,2.66 ccw(c21.478,3.05) 21.478,2.5 60.272,2.5 ccw(c60.272,3.05) 60.661,2.661 65.339,7.339 ccw(c64.95,7.728) 65.5,7.728 65.5,10.506 ccw(c64.95,10.506) 65.339,10.895 J2.5
BAT+: J2.7 J3.7 | length 87.3
  Top Layer w0.33: J3.7@10.295,23.165 J3.7
  Top Layer w0.55: J3.7 9.37,23.13 8.661,23.839 8.66,23.84 cw(c9.05,24.228) 8.5,24.228 8.5,35.772 cw(c9.05,35.772) 8.661,36.161 10.839,38.339 cw(c11.228,37.95) 11.228,38.5 62.272,38.5 cw(c62.272,37.95) 62.661,38.339 65.84,35.16 cw(c65.45,34.772) 66,34.772 66,26 J2.7
CHANGE_SOURCE: IC1.9 R14.1 | length 8.7
  Top Layer w0.33: R14.1 40.5,16.75 40.7,16.95 IC1.9@40.7,18.262
EN: CP1.5 U1.10 | length 6.2
  Bottom Layer w0.33: U1.10 51.906,18.264 CP1.5
GND: C2.1 C3.1 C4.1 C5.1 C6.2 C12.1 C13.1 C14.1 C15.1 C16.1 C17.1 C18.1 CP1.6 D3.1 IC1.5 IC1.21 IC2.7 IC2.10 IC2.17 IC3.2 IC5.1 ICSP1.6 J2.2 J2.9 J3.2 J3.9 LED1.2 Q1.2 R2.2 R5.1 R16.1 R17.1 U1.1 U1.15 U1.27 X1.4 | length 11.9
  Top Layer w0.254: C3.1 37.525,22.1 IC1.5
  Bottom Layer w0.254: C12.1 25.325,21.075 27.227,22.977 27.227,23.527 IC2.7 27.273,23.848 27.273,24.277 IC2.17@27.378,24.878 ; C6.2 23.8,28.175 24.375,28.75 C5.1 ; IC2.10 26.348,24.773 26.777,24.773 IC2.17@27.378,25 ; IC2.17@27.25,24.75 IC2.17@27.378,24.878 ; v1(27.571,25.054) IC2.17 IC2.17@27.378,24.878
  other v1: 38.5,9 41.5,20.75 44.75,24.5
GND_MBUS: J2.8 J3.8 | length 97.8
  Top Layer w0.55: J3.8 9.118,20.36 cw(c9.118,20.91) 8.73,20.52 7.66,21.59 cw(c8.05,21.978) 7.5,21.978 7.5,36.272 cw(c8.05,36.272) 7.661,36.661 10.5,39.5 63,39.5 67,35.5 67,23.5 63.912,20.412 63.182,20.412 J2.8
LED13: IC1.17 ICSP1.3 R11.2 | length 19
  Top Layer w0.254: R11.2@51.735,16.765 51.735,16.415 R11.2@51.875,16.275
  Top Layer w0.33: IC1.17@47.738,19.7 48.8,19.7 R11.2@51.735,16.765 ; R11.2 52,16.275 52,11.08 ccw(c52.33,11.08) 52.33,10.75 53.92,10.75 cw(c53.92,10.42) 54.25,10.42 54.25,7.08 cw(c53.92,7.08) 53.92,6.75 ICSP1.3
"Line left N": C7.1 U1.17 | length 6.6
  Bottom Layer w0.222: C7.1@34.973,27.798 38.351,27.798
  Bottom Layer w0.254: C7.1 C7.1@34.973,27.798 ; U1.17 38.134,25.884 38.5,26.25 38.5,27.649 38.351,27.798
"Line left P": C8.1 U1.16 | length 2.6
  Bottom Layer w0.254: C8.1 34.925,26.3 35.779,27.154 U1.16
"Line out G": IC2.15 J2.6 J3.6 | length 89
  Top Layer w0.55: J3.6 10.33,28.33 19.5,37.5 53.272,37.5 cw(c53.272,36.95) 53.66,37.34 58.429,32.571 63,28 J2.6
  Bottom Layer w0.254: J3.6 10.33,28.33 10.926,28.926 cw(c11.105,28.746) 11.105,29 22.034,29 ccw(c22.034,29.254) 22.213,29.074 23.139,30 27.601,30 27.75,29.851 IC2.15
"Line out L": J3.1 K1.3 | length 8.8
  Top Layer w0.254: 19.451,25.5 19.6,25.649
  Top Layer w0.55: J3.1 14.955,25.5 19.451,25.5 ; 19.6,25.649 K1.3
"Line out L _CD": J2.1 K1.4 | length 53
  Top Layer w0.55: K1.4 17.4,32.172 cw(c17.95,32.172) 17.56,32.56 20.339,35.339 cw(c20.728,34.95) 20.728,35.5 52.272,35.5 cw(c52.272,34.95) 52.661,35.339 59.999,28.001 cw(c59.61,27.612) 60.16,27.612 J2.1
"Line out L_EMU": IC2.16 K1.2 | length 13.6
  Top Layer w0.254: K1.2@21.75,27.3 K1.2
  Top Layer w0.33: K1.2@21.75,27.3 v1(21.75,30.25)
  Bottom Layer w0.254: v1(21.75,30.25) 21.944,30.444 22.351,30.444 22.407,30.5 28.101,30.5 28.25,30.351 IC2.16
"Line out R": J3.3 K1.6 | length 8.4
  Top Layer w0.55: J3.3 14.265,22.84 cw(c14.653,22.45) 14.653,23 19.05,23 cw(c19.05,22.45) 19.6,22.45 K1.6
"Line out R_CD": J2.3 K1.5 | length 77.6
  Top Layer w0.55: K1.5 17.275,20.525 17.161,20.447 cw(c16.85,20.9) 16.85,20.35 12.3,20.35 cw(c12.3,20.9) 11.75,20.9 11.75,28.022 cw(c12.3,28.022) 11.91,28.41 19.839,36.339 cw(c20.228,35.95) 20.228,36.5 52.772,36.5 cw(c52.772,35.95) 53.16,36.34 61.473,28.027 cw(c61.082,27.64) 61.632,27.64 61.632,23.315 cw(c61.082,23.315) 61.471,22.926 J2.3
"Line out R_EMU": IC2.5 K1.7 | length 13.7
  Top Layer w0.254: K1.7@21.75,21.2 K1.7
  Top Layer w0.33: v1(21.75,18.75) K1.7@21.75,21.2
  Bottom Layer w0.254: v1(21.75,18.75) 27,18.75 29,20.75 29,22.8 IC2.5
"Line right N": C10.1 U1.19 | length 2.3
  Bottom Layer w0.254: C10.1@34.925,23 34.925,23.021 35.248,23.344 U1.19
"Line right P": C9.1 U1.18 | length 2.2
  Bottom Layer w0.254: C9.1 35.061,24.614 U1.18
LK: CP1.4 U1.9 | length 5.7
  Bottom Layer w0.254: CP1.4@54.321,17.753 CP1.4@55,17.753
  Bottom Layer w0.33: U1.9 52.541,19.534 CP1.4@54.321,17.753
MBUS: J3.4 K2.3 | length 10
  Top Layer w0.55: J3.4 18.025,18.975 19.65,17.35 K2.3
MBUS_CD: J2.4 K2.4 | length 118.9
  Top Layer w0.55: K2.4 11.758,14.5 6.5,19.758 6.5,37 10,40.5 63.5,40.5 68,36 68,21.228 cw(c67.45,21.228) 67.84,20.84 66.005,19.005 cw(c65.617,19.395) 65.617,18.845 J2.4
MBUS_IN_PIN: IC1.32 Q2.2 R17.2 | length 10.7
  Top Layer w0.254: R17.2 31.25,27 31.5,26.75 33.45,26.75 Q2.2 IC1.32@40.662,26.7
MBUS_OUT_PIN: IC1.1 R15.1 | length 2.2
  Top Layer w0.254: R15.1 37.15,25.3 IC1.1@39.262,25.3
MBUSEMU: K2.2 R12.1 | length 27.8
  Top Layer w0.254: K2.2 21.85,16.045 ccw(c21.596,16.045) 21.777,16.223 20.574,17.426 cw(c20.754,17.605) 20.5,17.605 20.5,22.895 cw(c20.754,22.895) 20.574,23.074 23.426,25.926 ccw(c23.246,26.105) 23.5,26.105 23.5,28.496 cw(c23.754,28.496) 23.754,28.75 25.579,28.75 cw(c25.579,28.496) 25.833,28.496 25.833,22.271 ccw(c26.087,22.273) 25.906,22.094 27.145,20.855 ccw(c27.323,21.036) 27.321,20.782 28.368,20.782 R12.1
MISO: IC1.16 ICSP1.1 R8.1 | length 19.1
  Top Layer w0.254: IC1.16@46.3,18.262 48.488,18.262 50,16.75 ; R8.1 50,16.75 ; ICSP1.1 51.25,5.48 51.25,15.5 50,16.75
MOSI: IC1.15 ICSP1.4 R2.1 | length 17
  Top Layer w0.33: IC1.15@45.5,18.262 45.5,9.75 47.45,7.8 48.5,6.75 ICSP1.4
  Bottom Layer w0.254: R2.1 ICSP1.4
NetC1_1: C1.1 R5.2 X1.1 | length 23.1
  Top Layer w0.33: X1.1 27.75,32.559 27.75,34 28.153,34.403 cw(c28.387,34.17) 28.387,34.5 36.113,34.5 cw(c36.113,34.17) 36.347,34.403 37.228,33.522 cw(c36.995,33.288) 37.325,33.288 37.325,30.505 ccw(c37.655,30.505) 37.655,30.175 C1.1
  Bottom Layer w0.33: R5.2 X1.1@27.69,32.5
NetC6_1: C6.1 IC2.12 | length 2.7
  Bottom Layer w0.254: C6.1 24.7,26.825 25.775,25.75 IC2.12
NetC7_2: C7.2 IC2.1 | length 5.5
  Bottom Layer w0.254: IC2.1 30.5,25.75 32.5,27.75 C7.2
NetC8_2: C8.2 IC2.2 | length 5
  Bottom Layer w0.254: IC2.2 31,25.25 32,26.25 C8.2
NetC9_2: C9.2 IC2.3 | length 4.6
  Bottom Layer w0.254: IC2.3 C9.2
NetC10_2: C10.2 IC2.4 | length 5.1
  Bottom Layer w0.254: IC2.4 31,24.25 32.25,23 C10.2@33.575,23
NetC11_1: C11.1 IC2.9 | length 2.4
  Bottom Layer w0.254: C11.1 23.925,24.25 IC2.9
NetC11_2: C11.2 IC2.11 | length 2.4
  Bottom Layer w0.254: C11.2 23.925,25.25 IC2.11
NetC12_2: C12.2 IC2.8 | length 3.6
  Bottom Layer w0.254: C12.2 25.625,22.425 26.452,23.252 26.727,23.252 26.75,23.275 IC2.8
NetIC1_12: IC1.12 R9.2 | length 3.6
  Top Layer w0.33: R9.2 42.75,16.25 43.1,16.6 IC1.12@43.1,18.762
NetIC1_13: IC1.13 R10.2 | length 3.6
  Top Layer w0.33: IC1.13@43.891,18.753 43.891,16.609 44.25,16.25 R10.2
NetIC1_23: IC1.23 R4.1 | length 4.1
  Top Layer w0.254: R4.1@51.75,24.15 R4.1@51.75,24.2
  Top Layer w0.33: IC1.23@47.847,24.473 51.477,24.473 R4.1@51.75,24.2
NetIC1_24: IC1.24 R3.1 | length 2.1
  Top Layer w0.254: R3.1@49.45,25.3 R3.1@49.75,25.6
  Top Layer w0.33: IC1.24@47.738,25.3 R3.1@49.45,25.3
NetIC4_1: IC4.1 R14.2 | length 1.8
  Top Layer w0.254: IC4.1 IC4.1@30.25,16.75
  Top Layer w0.33: IC4.1@30.25,16.75 R14.2
NetIC4_2: IC4.2 R16.2 | length 1.7
  Top Layer w0.254: IC4.2 IC4.2@30.15,18.25
  Top Layer w0.33: IC4.2@30.15,18.25 R16.2
NetLED1_1: LED1.1 R11.1 | length 1.7
  Top Layer w0.33: R11.1 LED1.1
NetQ1_1: Q1.1 R15.2 | length 6.3
  Top Layer w0.254: Q1.1 33.55,19.8 33.823,20.073 Q1.1@33.823,20.123
  Top Layer w0.33: Q1.1@33.823,20.123 35.4,21.7 R15.2
NetQ1_3: Q1.3 R12.2 R13.1 | length 4
  Top Layer w0.254: Q1.3 Q1.3@31.524,20.774 ; R13.1@31.524,23.124 R13.1
  Top Layer w0.33: R12.2 Q1.3 ; Q1.3@31.524,20.774 R13.1@31.524,23.124
NetQ2_1: Q2.1 R13.2 | length 1.6
  Top Layer w0.254: Q2.1@33.35,24.65 Q2.1
  Top Layer w0.33: R13.2 Q2.1@33.35,24.65
NFSCH: D2.1 IC4.3 K1.8 K2.8 | length 15.8
  Top Layer w0.254: K2.8@24.93,8.38 K2.8 K2.8@25.05,9.1
  Top Layer w0.33: K1.8 25,19.2 D2.1@26.75,17.45 ; K2.8@25.05,9.1 26.75,10.8 D2.1@26.75,17.45 ; IC4.3 D2.1@26.75,17.45
PAUSE: R10.1 U1.30 | length 3.8
  Top Layer w0.254: R10.1 R10.1@44.294,13.606 ; v1@44.294,12.481 44.5,12.275 v1(44.5,12)
  Top Layer w0.33: v1@44.294,12.481 R10.1@44.294,13.606
  Bottom Layer w0.254: U1.30 U1.30@44.25,13.917
  Bottom Layer w0.33: U1.30@44.25,13.917 44.25,13 44.5,12.75 v1(44.5,12)
PLAY: R9.1 U1.31 | length 3.7
  Top Layer w0.33: v1(42.75,12) R9.1
  Bottom Layer w0.254: U1.31 U1.31@43,13.897
  Bottom Layer w0.33: v1(42.75,12) 42.75,12.75 42.951,12.951 U1.31
PowerUpBT: R8.2 U1.13 | length 4.1
  Top Layer w0.254: v1(50,12.25) R8.2
  Bottom Layer w0.254: U1.13@50,14.391 U1.13 U1.13@50.206,14.231
  Bottom Layer w0.33: v1(50,12.25) U1.13@50,14.391
RESET: C1.2 IC1.29 ICSP1.5 R1.1 | length 41.3
  Top Layer w0.254: IC1.29 IC1.29@43.175,26.825 ; C1.2@43.1,28.675 C1.2
  Top Layer w0.33: IC1.29 C1.2@43.1,28.675 ; C1.2 46.188,28.825 ccw(c46.188,29.155) 46.421,28.921 47.403,29.903 ; 47.403,29.903 cw(c47.637,29.67) 47.637,30 55.613,30 cw(c55.613,29.67) 55.846,29.904 57.154,28.596 cw(c56.92,28.363) 57.25,28.363 v1(57.25,9.25)
  Bottom Layer w0.254: ICSP1.5 ICSP1.5@52.54,9.27 ; v1@57.23,9.27 v1(57.25,9.25)
  Bottom Layer w0.33: ICSP1.5@52.54,9.27 v1@57.23,9.27
SB: CP1.1 U1.6 | length 5.8
  Bottom Layer w0.254: CP1.1@54.22,25.373 CP1.1@55,25.373
  Bottom Layer w0.33: U1.6 52.191,23.344 CP1.1@54.22,25.373
SI: CP1.3 U1.8 | length 5.2
  Bottom Layer w0.254: U1.8 U1.8@50.686,20.85 ; CP1.3@54.97,20.22 CP1.3
  Bottom Layer w0.33: U1.8@50.686,20.804 52.696,20.804 53.28,20.22 CP1.3@54.97,20.22
"SKIP B": R3.2 U1.2 | length 5
  Top Layer w0.254: v1@51.734,28.75 v1(51.755,28.73)
  Top Layer w0.33: R3.2 49.75,28.351 50.149,28.75 v1@51.734,28.75
  Bottom Layer w0.254: U1.2 50.226,28.587 50.236,28.577 51.602,28.577 v1(51.755,28.73)
"SKIP F": R4.2 U1.3 | length 3.1
  Top Layer w0.33: R4.2 v1(52,27.25)
  Bottom Layer w0.254: U1.3 50.111,27.202 51.702,27.202 v1@51.75,27.25
SO: CP1.2 U1.7 | length 5.4
  Bottom Layer w0.254: U1.7 U1.7@50.686,22.112 ; CP1.2@54.96,22.75 CP1.2 ; CP1.2@55.516,22.112 ccw(c55.516,22.366) CP1.2@55.695,22.186
  Bottom Layer w0.33: U1.7@50.686,22.074 52.574,22.074 53.25,22.75 CP1.2@54.96,22.75
"UART RX": IC1.30 X1.3 | length 15
  Top Layer w0.33: X1.3 32.75,32.479 32.75,29.25 32.903,29.097 ccw(c33.137,29.33) 33.137,29 41.92,29 cw(c41.92,28.67) 42.25,28.67 42.25,26.8 IC1.30
"UART TX": IC1.31 X1.2 | length 16.7
  Top Layer w0.33: X1.2 30.231,28.58 ccw(c30.561,28.58) 30.561,28.25 41.17,28.25 cw(c41.17,27.92) 41.5,27.92 IC1.31
pads on no net: IC1.2 IC1.3 IC1.6 IC1.7 IC1.8 IC1.10 IC1.11 IC1.14 IC1.19 IC1.20 IC1.22 IC1.25 IC1.26 IC1.27 IC1.28 J2.10 J2.11 J3.MH1 J3.MH2 K2.7 U1.4 U1.5 U1.11 U1.14 U1.20 U1.21 U1.22 U1.23 U1.24 U1.25 U1.26 U1.28 U1.29 U1.32 U1.33 U1.34

## Polygon pours and split planes (outlines as drawn)
GND on Top Layer "GND_L01_P003" (solid, pour order 3): 0,0 73,0 73,42.5 72.75,42.75 49,42.75 49,30 38.25,30 38.25,43 0,43
GND on Top Layer "GND_L01_P005" (solid, pour order 5): 38.25,42.612 49,42.612 49,33.75 38.25,33.75
GND on Bottom Layer "GND_L02_P006" (solid, pour order 6): 38.25,42.612 49,42.612 49,33.75 38.25,33.75
GND on Bottom Layer "GND_L02_P002" (solid, pour order 2): 0,0 73,0 73,42.5 72.75,42.75 49,42.75 49,30 38.25,30 38.25,43 0,43

## Keep-outs
Keep-Out Layer:
  lines w0.254: 0,1.27 ccw(c1.27,1.27) 1.27,0 71.73,0 ccw(c71.73,1.27) 73,1.27 73,41.73 ccw(c71.73,41.73) 71.73,43 43,43 1.27,43 ccw(c1.27,41.73) 0,41.73 0,1.27

## Other copper
Bottom Layer:
  text "CDCEMU_ALPINE hw01" at 34.246,38.758 h1.52